# EAGLE board H1DR0x-AT (EAGLE 9.6.0)
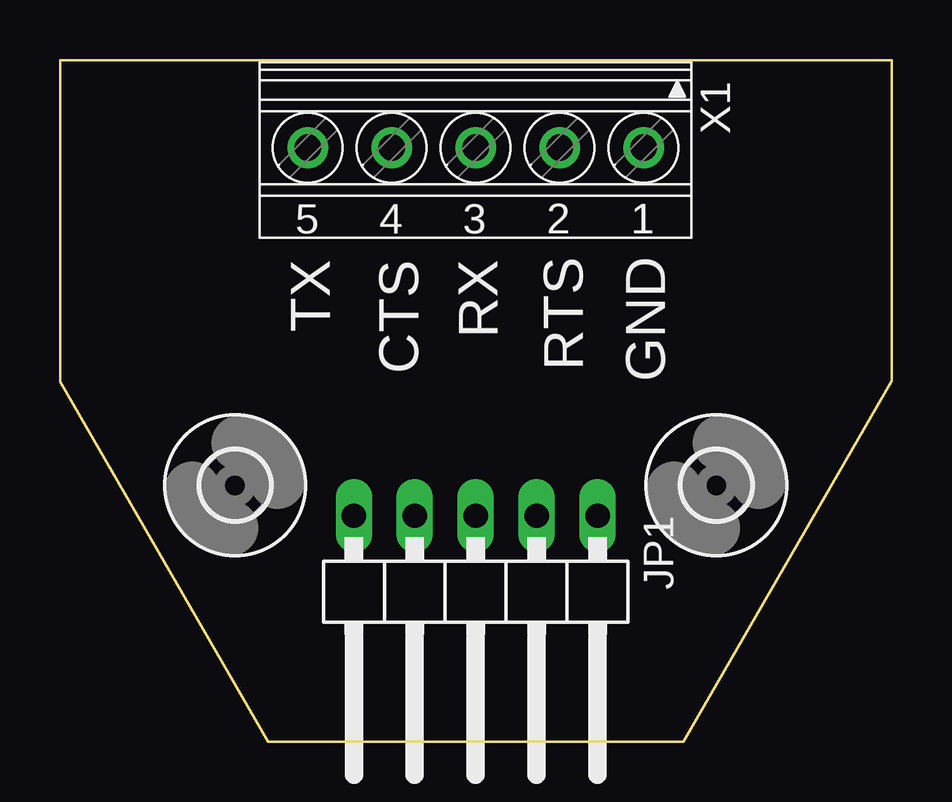
[diagram p0: board, top side]
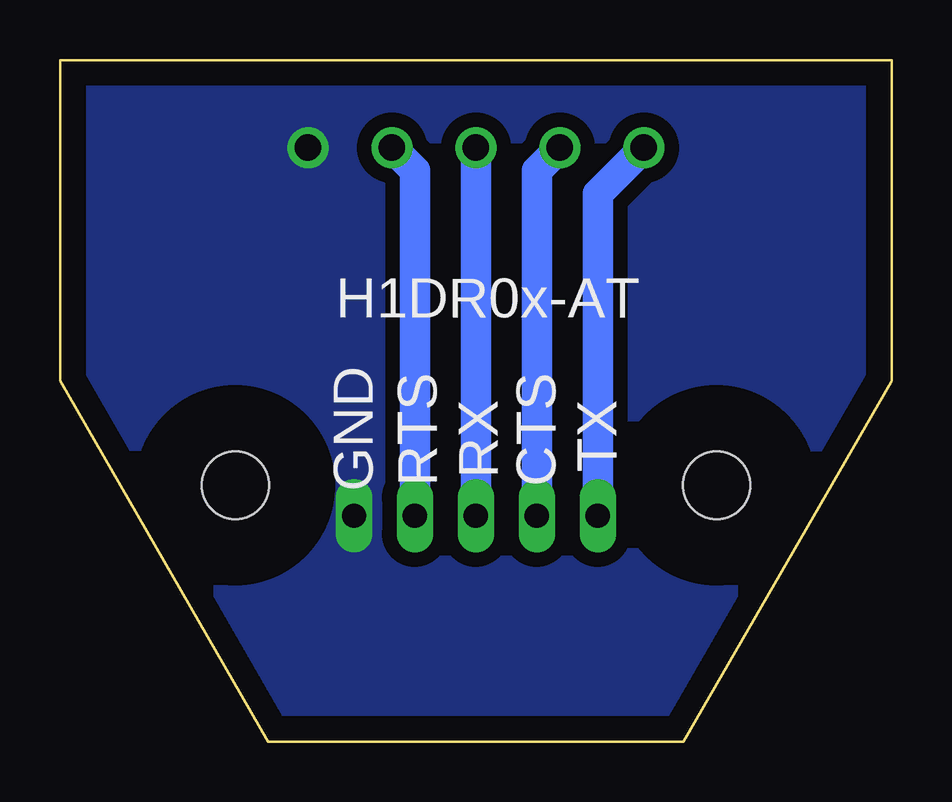
[diagram p1: board, bottom side, seen from below]

Size 34.67 x 28.4 mm. Coordinates in mm from the lower left corner, seen from the top.
Copper layers (1*16): Top 0.035mm / dielectric 0.15mm / Bottom 0.035mm
Design rules "default": minimum track width 6mil, minimum drill 0.35mm, track to track 6mil, track to pad 6mil, pad to pad 6mil, via to via 6mil, smd to smd 6mil, copper to edge 40mil, drill to drill 6mil, minimum pad ring 10mil, minimum via ring 8mil, stop-mask expansion 4mil, vias tented up to drill 0mil, thermal gap 10mil

## Footprints (pad centres in the part's own frame; a part is rotated, then mirrored left to right if it is on the bottom)
2,8 = hole 2.8: 0,0
1X05/90 = drill 1.016 long: 1 -5.08,-3.81; 2 -2.54,-3.81; 3 0,-3.81; 4 2.54,-3.81; 5 5.08,-3.81
CON-PHOENIX-350_1751277 = drill 1.1 pad 1.7: 1 -7,-0.1; 2 -3.5,-0.1; 3 0,-0.1; 4 3.5,-0.1; 5 7,-0.1

## Placement (x,y rotation side)
H1  MOUNT-HOLE2.8  [2,8]  27.36,10.68 0 top
H2  MOUNT-HOLE2.8  [2,8]  7.3,10.68 0 top
JP1  [1X05/90]  17.33,5.6 180 top
U$1  HEXABIT_BUS_ADAPTER  [HEXABIT_BUS_ADAPTER]  17.34,15 0 top
X1  CON-PHOENIX-350_1751277  [CON-PHOENIX-350_1751277]  17.33,24.65 180 top

## Library data of the parts
H1 H2 JP1 = Hexabitz
U$1 = hexabitz_connectors
X1 = Hexabitz; OC_FARNELL: unknown; OC_NEWARK: unknown

## Nets
CTS_OUT: JP1.4 X1.4
GND: JP1.1 X1.1
RTS_OUT: JP1.2 X1.2
RX_OUT: JP1.3 X1.3
TX_OUT: JP1.5 X1.5

## Tracks (layer width: path | path; a pad name or v marks a point on that pad's centre or on a via)
CTS_OUT
  Bottom 1.27: JP1.4 14.79,23.79 X1.4
GND
  pour Bottom (isolate 0.61, no thermals): 34.48,29.73 0.19,29.73 0.19,1.15 34.48,1.15
RTS_OUT
  Bottom 1.27: JP1.2 19.87,23.79 X1.2
RX_OUT
  Bottom 1.27: JP1.3 X1.3
TX_OUT
  Bottom 1.27: JP1.5 12.25,22.83 X1.5

## Text on the board
tPlace: TX | CTS | RX | RTS | GND
bPlace: H1DR0x-AT | CTS | RTS | GND | TX | RX